# Altium PCB pbcBoard.PcbDoc
Units mm, origin at the board's own origin, x right, y up, seen from the top; angles counter-clockwise.
Board outline 100 x 50 mm, 2 copper layers (Top Layer, Bottom Layer); 38 components, 24 nets, 181 pads, 64 vias.
Unrouted connection lines stored in the file: 1.
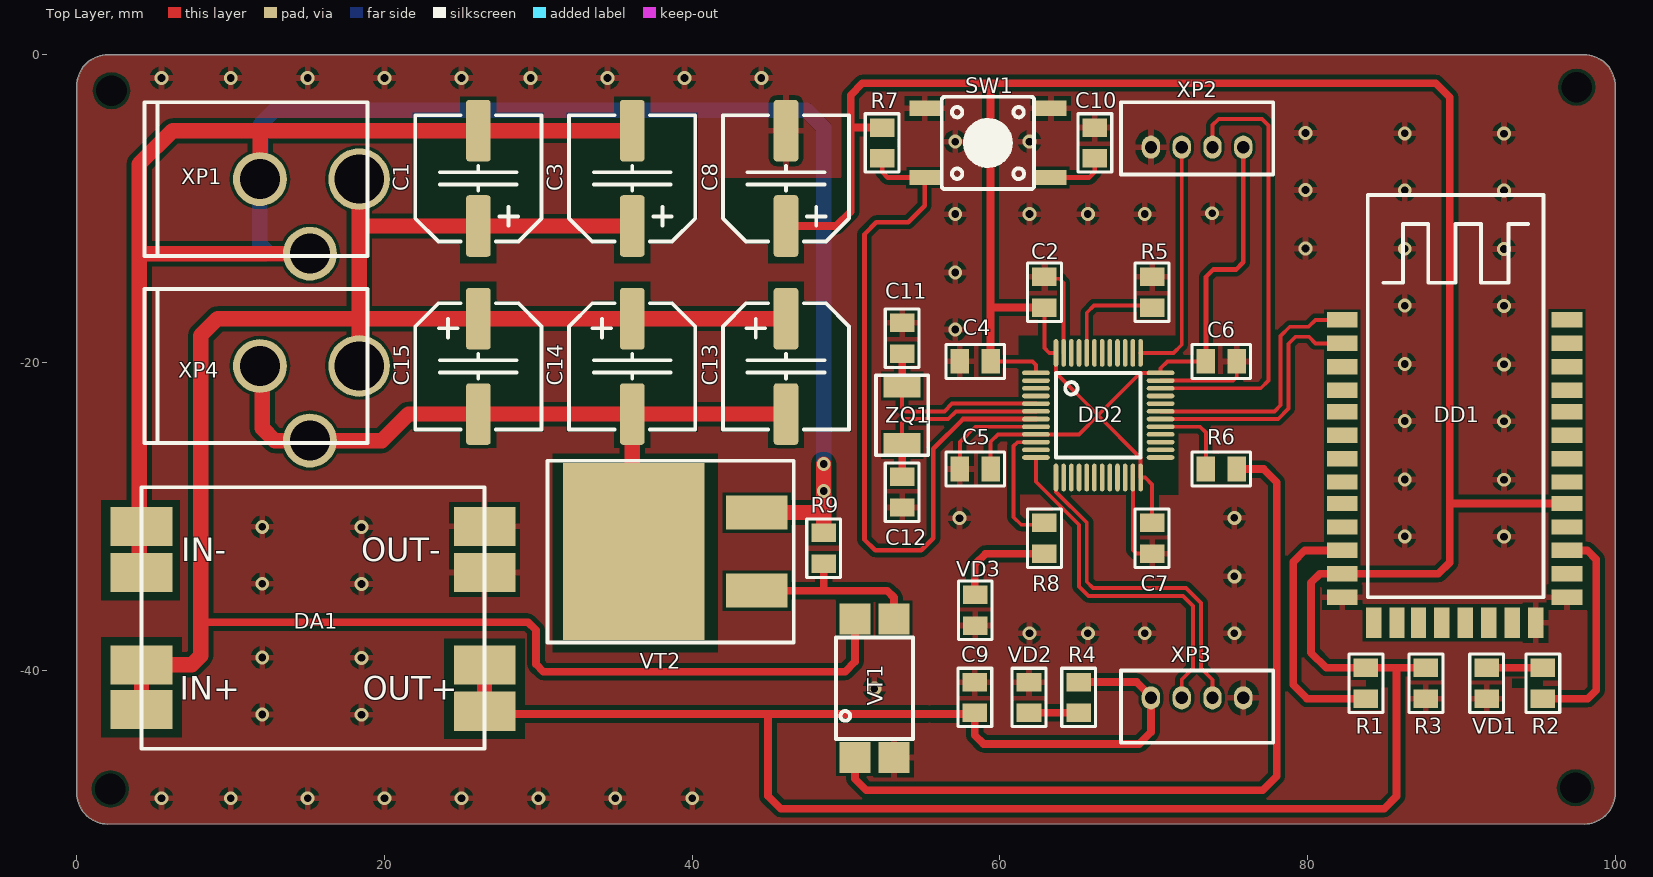
[diagram p0: Top Layer view]
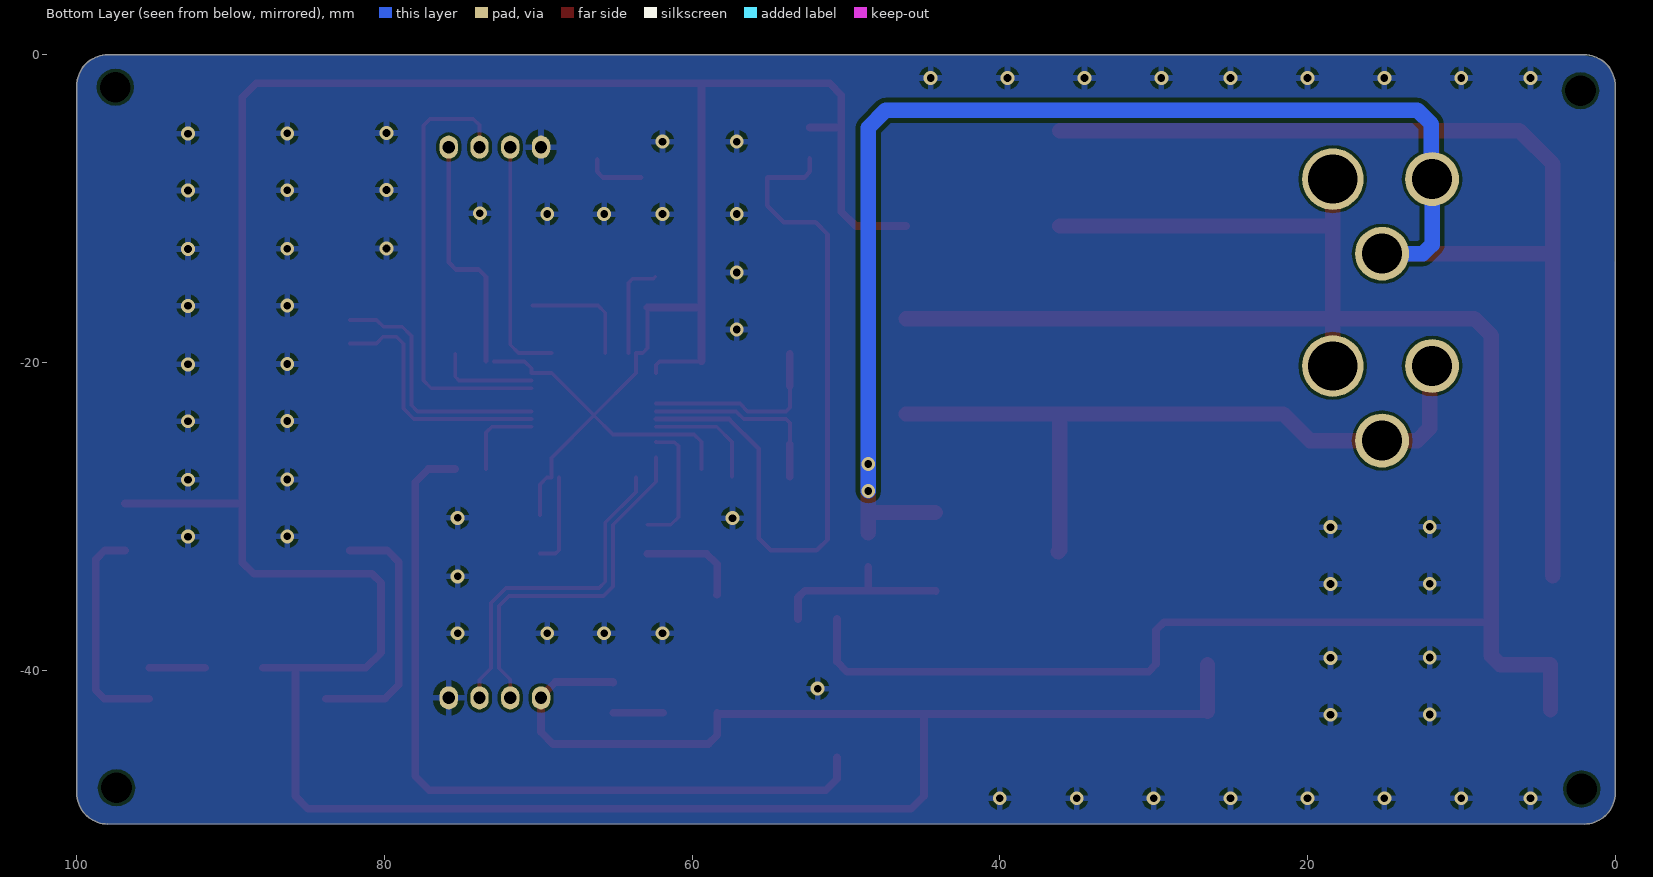
[diagram p1: Bottom Layer view, seen from below]
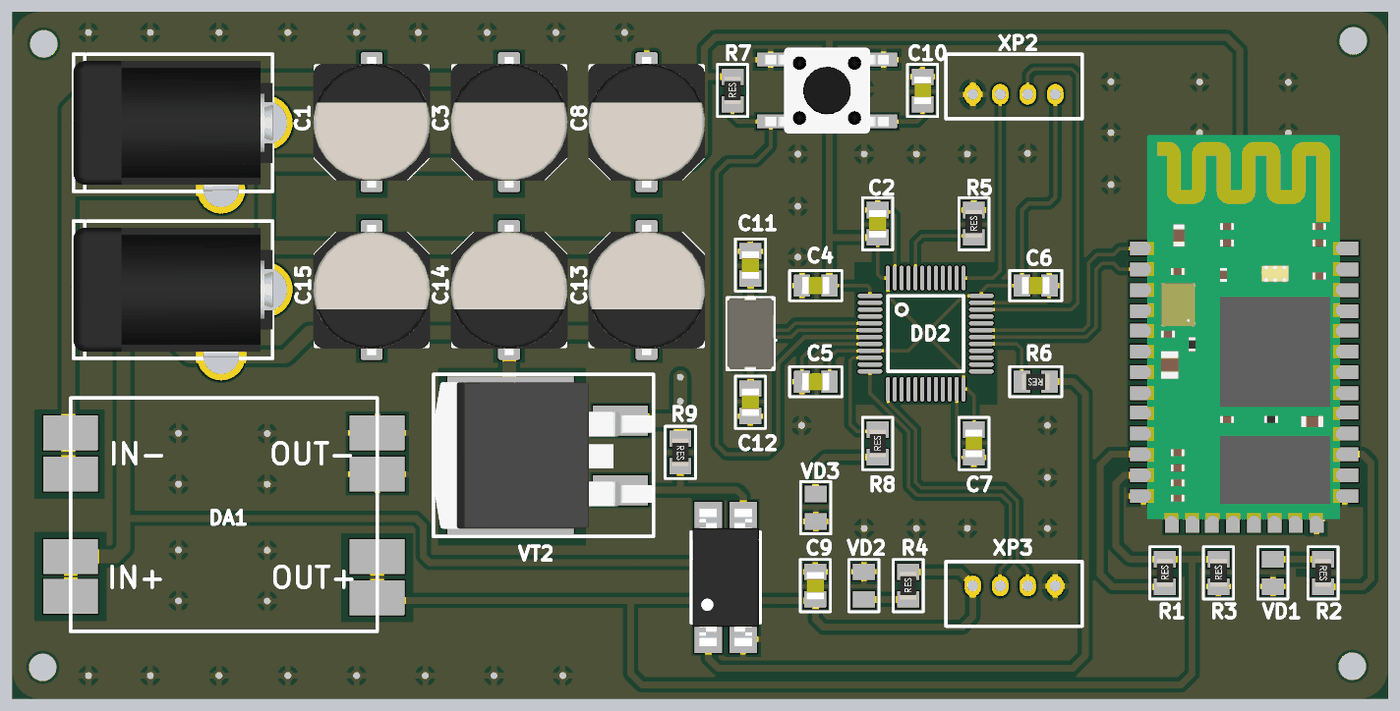
[diagram p2: 3D render of the assembled board from above, using the file's embedded part models]

## Layer stack, top to bottom
Top Solder: solder mask 0.0102, Solder Resist, Dk 3.5
Top Layer: signal copper 0.0356
Dielectric 1: dielectric 0.32, FR-4, Dk 4.8
Bottom Layer: signal copper 0.0356
Bottom Solder: solder mask 0.0102, Solder Resist, Dk 3.5

## Board outline
0,-48 0,-2 cw(c2,-2) 2,0 98,0 cw(c98,-2) 100,-2 100,-48 cw(c98,-48) 98,-50 2,-50 cw(c2,-48)

## Design rules (kind name [scope] priority, off if disabled: settings)
Clearance [All] p1: gap=0.2 ignorepadtopadclearanceinfootprint=FALSE except(0.3: Arc-Fill Arc-Poly Arc-Region Track-Fill Track-Poly Track-Region)
DiffPairsRouting [All] p1: maxlimit=0.254 minlimit=0.1 mostfreqgap=0.254 toplayer_minwidth=0.1 toplayer_maxwidth=0.381 toplayer_prefwidth=0.381 bottomlayer_minwidth=0.1 bottomlayer_maxwidth=0.381 bottomlayer_prefwidth=0.381 maxuncoupledlength=12.7
PolygonConnect [All] p1: thpad.connectstyle=Relief thpad.reliefconductorwidth=0.4 thpad.reliefentries=4 thpad.polygonreliefangle="90 Angle" thpad.airgapwidth=0.4 smdpad.connectstyle=Relief smdpad.reliefconductorwidth=0.4 smdpad.reliefentries=4 smdpad.polygonreliefangle="90 Angle" smdpad.airgapwidth=0.3 via.connectstyle=Relief via.reliefconductorwidth=0.4 via.reliefentries=4 via.polygonreliefangle="90 Angle" via.airgapwidth=0.3
RoutingVias [All] p1: holewidth=0.711 width=1.27 viastyle="Through Hole" minholewidth=0.711 minwidth=1.27 maxholewidth=0.711 maxwidth=1.27
SolderMaskExpansion [All] p1: expansion=0.102
Width [All] p1: maxlimit=2 minlimit=0.2 preferedwidth=0.254
29 further rules are at their usual default settings.

## Classes and differential pairs
component class Schematic: C1 C2 C4 C5 C6 C7 C8 C9 C10 C11 C12 C14 DA1 DD1 DD2 R1 R2 R3 R4 R5 R6 R7 R8 R9 SW1 VD1 VD2 VD3 VT1 VT2 XP2 XP3 XP4 XS1 XS2 ZQ1

## Components (designator, comment, footprint, x,y, rotation, side; value= is the part's Value field where it differs from the comment)
C1 "220uF_25V_chip" chip_25V_220uF 26.1,-8.025 r0 top value="220 ???"
C2 "SMD0805" "CAP: SMD0805" 62.9,-15.425 r270 top value=0,1???
C3 "220uF_25V_chip" chip_25V_220uF 36.1,-8.025 r0 top value="220 ???"
C4 "SMD0805" "CAP: SMD0805" 58.4,-19.925 r0 top value=0,1???
C5 "SMD0805" "CAP: SMD0805" 58.4,-26.925 r0 top value=0,1???
C6 "SMD0805" "CAP: SMD0805" 74.4,-19.925 r180 top value=0,1???
C7 "SMD0805" "CAP: SMD0805" 69.9,-31.425 r90 top value=0,1???
C8 "220uF_25V_chip" chip_25V_220uF 46.1,-8.025 r0 top value="220 ???"
C9 "SMD0805" "CAP: SMD0805" 58.375,-41.775 r270 top value=0,1???
C10 "SMD0805" "CAP: SMD0805" 66.175,-5.725 r270 top value=0,1???
C11 "SMD0805" "CAP: SMD0805" 53.65,-18.425 r90 top value=22???
C12 "SMD0805" "CAP: SMD0805" 53.65,-28.425 r270 top value=22???
C13 "220uF_25V_chip" chip_25V_220uF 46.1,-20.25 r180 top value="220 ???"
C14 "220uF_25V_chip" chip_25V_220uF 36.1,-20.25 r180 top value="220 ???"
C15 "220uF_25V_chip" chip_25V_220uF 26.1,-20.25 r180 top value="220 ???"
DA1 "MP2363DN" MP2363DN 4.2,-28.11 r0 top
DD1 "HC-06" HC-06 89.25,-21.8 r0 top
DD2 "STM32F103C8T6" LQFP48_N 66.4,-23.425 r0 top
R1 "4,7кОм" "RES: SMD0805" 83.8,-40.85 r90 top
R2 "470Ом" "RES: SMD0805" 95.3,-40.85 r270 top
R3 "4,7кОм" "RES: SMD0805" 87.7,-40.85 r90 top
R4 "470Ом" "RES: SMD0805" 65.125,-41.775 r90 top
R5 "4,7кОм" "RES: SMD0805" 69.9,-15.425 r90 top
R6 "1кОм" "RES: SMD0805" 74.4,-26.925 r180 top
R7 "4,7кОм" "RES: SMD0805" 52.35,-5.725 r90 top
R8 "470Ом" "RES: SMD0805" 62.9,-31.425 r90 top
R9 "10кОм" "RES: SMD0805" 48.55,-32.075 r270 top
SW1 "SWITCH" KLS76X6X4.3 59.225,-5.725 r180 top
VD1 "RED" LED0805 91.65,-40.85 r270 top
VD2 "RED" LED0805 61.9,-41.775 r90 top
VD3 "RED" LED0805 58.4,-36.1 r270 top
VT1 "PC817" DIP4_SMD_PC817 51.85,-41.175 r0 top
VT2 "IRF540" IRF540_D2PAK 36.2,-32.29 r90 top
XP1 "PORT" DJK-02A 11.65,-8.075 r270 top
XP2 "PORT" PH2.0-4P 72.825,-6 r180 top
XP3 "PORT" PH2.0-4P 72.825,-41.8 r0 top
XP4 "PORT" DJK-02A 11.65,-20.225 r270 top
ZQ1 "8MHz" HC-49SM 53.65,-23.425 r270 top

## Footprints (in the part's own frame and the unit in brackets; to place one, negate y for a bottom-side part, rotate by r counter-clockwise, add the part's x,y. Pads: shape width x height; smd on the part's side, far side on the other; paste and mask are expansions set on the pad)
"CAP: SMD0805" [mm]
  rect 1.2x1.6 smd: 1(-1,0) 2(1,0)
  silkscreen extent -1.9,-1.1 1.9,1.1, body extent -1,-0.62 1,0.63, height 1.01
chip_25V_220uF [mm] "Capacitor, polarized, aluminum can; 8.0x6.2mm DxH"
  round 0.635 on Mech15: 0(0,0)
  rrect25% 1.6x4 smd: 1(0,-3.1) 2(0,3.1)
  silkscreen extent -4.1,-4.1 4.1,4.1, body extent -4.25,-4.75 4.25,4.75, height 6.5
DIP4_SMD_PC817 [mm]
  rect 2x2 smd: 1(-1.27,-4.5) 2(1.27,-4.5) 3(1.27,4.5) 4(-1.27,4.5)
  silkscreen extent -2.5,-3.3 2.5,3.3, body extent -2.42,-5.01 2.42,5.02, height 3.9
DJK-02A [mm]
  round 4 hole 3.2: 1(0,6.7)
  round 3.5 hole 2.6: 2(0,0.25) 2(4.85,3.5)
  silkscreen extent -5,-7.25 5,7.25, body extent -4.5,-7.25 4.95,7.25, height 11.5
HC-06 [mm]
  rect 2x1 smd: 1(-6.985,4.572) 2(-6.985,3.048) 3(-6.985,1.524) 4(-6.985,0) 5(-6.985,-1.397) 6(-6.985,-2.921) 7(-6.985,-4.445) 8(-6.985,-5.969) 9(-6.985,-7.366) 10(-6.985,-8.89) 11(-6.985,-10.414) 12(-6.985,-11.938) 13(-6.985,-13.462) 22(7.62,-13.462) 23(7.62,-11.938) 24(7.62,-10.414) 25(7.62,-8.89) 26(7.62,-7.366) 27(7.62,-5.969) 28(7.62,-4.445) 29(7.62,-2.921) 30(7.62,-1.397) 31(7.62,0) 32(7.62,1.524) 33(7.62,3.048) 34(7.62,4.572)
  rect 1x2 smd: 14(-4.953,-15.113) 15(-3.429,-15.113) 16(-2.032,-15.113) 17(-0.508,-15.113) 18(1.016,-15.113) 19(2.54,-15.113) 20(4.064,-15.113) 21(5.588,-15.113)
  silkscreen extent -5.33,-13.46 6.1,12.7, body extent -6.74,-15.19 7.28,12.82, height 2.35
HC-49SM [mm]
  rect 1.5x2.4 smd: 1(-1.9,0) 2(1.9,0)
  silkscreen extent -2.6,-1.7 2.6,1.7, body extent -2.6,-1.7 2.6,1.7, height 1.3
IRF540_D2PAK [mm]
  rect 2.2x4 smd: 1(-2.54,-8) 3(2.54,-8)
  rect 11.5x9.2 smd: 2(0,0)
  silkscreen extent -5.9,-10.4 5.9,5.6, body extent -5.33,-10.29 5.34,5.59, height 4.83
KLS76X6X4.3 [mm]
  rect 2x1 smd: 1(-4.1,2.25) 1(4.1,2.25) 2(-4.1,-2.25) 2(4.1,-2.25)
  silkscreen extent -3,-3 3,3, body extent -4.5,-3 4.5,3, height 4.3
LED0805 [mm]
  rect 1.2x1.6 smd: 1(-1,0) 2(1,0)
  silkscreen extent -1.9,-1.1 1.9,1.1, body extent -1.05,-0.67 1.05,0.68, height 0.9
LQFP48_N [mm] "QFP, 48-Leads, Body 7x7mm, Pitch 0.5mm, IPC Medium Density"
  oval 1.8x0.3 smd: 1(-4.05,2.75) 2(-4.05,2.25) 3(-4.05,1.75) 4(-4.05,1.25) 5(-4.05,0.75) 6(-4.05,0.25) 7(-4.05,-0.25) 8(-4.05,-0.75) 9(-4.05,-1.25) 10(-4.05,-1.75) 11(-4.05,-2.25) 12(-4.05,-2.75) 25(4.05,-2.75) 26(4.05,-2.25) 27(4.05,-1.75) 28(4.05,-1.25) 29(4.05,-0.75) 30(4.05,-0.25) 31(4.05,0.25) 32(4.05,0.75) 33(4.05,1.25) 34(4.05,1.75) 35(4.05,2.25) 36(4.05,2.75)
  oval 0.3x1.8 smd: 13(-2.75,-4.05) 14(-2.25,-4.05) 15(-1.75,-4.05) 16(-1.25,-4.05) 17(-0.75,-4.05) 18(-0.25,-4.05) 19(0.25,-4.05) 20(0.75,-4.05) 21(1.25,-4.05) 22(1.75,-4.05) 23(2.25,-4.05) 24(2.75,-4.05) 37(2.75,4.05) 38(2.25,4.05) 39(1.75,4.05) 40(1.25,4.05) 41(0.75,4.05) 42(0.25,4.05) 43(-0.25,4.05) 44(-0.75,4.05) 45(-1.25,4.05) 46(-1.75,4.05) 47(-2.25,4.05) 48(-2.75,4.05)
  silkscreen extent -2.75,-2.75 2.75,2.75, body extent -4.49,-4.49 4.49,4.49, height 1.6
MP2363DN [mm]
  rect 4x2.54 smd: 1(0,-5.54) 1(0,-2.54) 2(0,-14.46) 2(0,-11.54) 3(22.3,-14.56) 3(22.3,-11.54) 4(22.3,-5.54) 4(22.3,-2.54)
  silkscreen extent 0,-17 22.3,0, body extent 0,-17 22.3,0, height 4.2
PH2.0-4P [mm]
  oval 1.2x1.5 hole 0.8: 1(-3,0) 2(-1,0) 3(1,0) 4(3,0)
  silkscreen extent -4.95,-2.92 4.95,1.78, body extent -4.95,-2.85 4.95,1.65, height 6
"RES: SMD0805" [mm]
  rect 1.2x1.6 smd: 1(-1,0) 2(1,0)
  silkscreen extent -1.9,-1.1 1.9,1.1, body extent -1,-0.6 1,0.6, height 0.7

## Part data
C2 C4 C5 C6 C7 C9 C10 C11 C12: "CAP"
DA1: "??????????????? ??????????"
DD2: library part STM32F103C8T6(Dinara), I/Os (High Current)=37, Operating Frequency(F) (Processor speed) (MHz)=72, Supplier Part Number 1=497-6063-ND, Supply Voltage(Vcc) min (V)=2, A/D Converter="2x12-bit (10 Channel)", ComponentLink1Description="Manufacturer URL", ComponentLink1URL=http://www.st.com/web/en/home.html, ComponentLink2Description=Datasheet, ComponentLink2URL=http://www.st.com/st-web-ui/static/active/en/resource/technical/document/datasheet/CD00161566.pdf, ComponentLink3Description="Package Specification", ComponentLink3URL=http://www.st.com/st-web-ui/static/active/en/resource/technical/document/datasheet/DM00058181.pdf, Core="ARM Cortex-M3", DatasheetVersion="Rev. 16", FLASH Size (Prog) (kB)=64, Internal RAM Size (kB)=20, Mounting Technology="Surface Mount", PackageDescription="48-Pin Low Profile Quad Flat Package, 7 x 7 mm Body, 0.5 mm Pitch", PackageReference=LQFP48, PackageVersion="Rev. 6, 06/2013", Packing=Tray, PartNumber=STM32F103C8T6, Supplier 1=Digi-Key, Supplier 2=Farnell, Supplier 3=Newark, Supplier 4=Newark, Supplier 5=Mouser, Supplier Part Number 2=1447637, Supplier Part Number 3=59M2182, Supplier Part Number 4=57P1222, Supplier Part Number 5=511-STM32F103C8T6
R1 R2 R3 R4 R5 R6 R7 R8 R9: library part SMD0805
VD1 VD2 VD3: library part diode_led
XP1: library part PH2.0-2P_XS1
XP2: library part PH2.0-4P_XP1
XP3: library part PH2.0-4P_XP2
XP4: library part PH2.0-2P_XS2
ZQ1: library part HC-49
DD1: ComponentLink1Description=Datasheet, ComponentLink1URL=http://www.farnell.com/datasheets/2236920.pdf
SW1: ComponentLink1Description=AliExpress, ComponentLink1URL=https://ru.aliexpress.com/item/10PCS-4-4-1-6mm-4x4x1-6H-SMD-push-button-switch-microswitch-Tact-Switch/32731081870.html?spm=a2g0s.9042311.0.0.250233edGDnBBV
VT2: Published=10.02.2014, Publisher="Andrew Danich", Type=??????????

## Free pads (board coordinates)
  round 1.524 hole 2: 2(2.175,-47.725) 2(2.25,-2.325) 2(97.425,-47.65) 2(97.5,-2.1)

## Via types
v1: diameter 0.9, hole 0.5, Top Layer to Bottom Layer, tented both sides, 64 vias

## Nets (pads, with @x,y where several pads share a name; then routed paths per layer and width w, separated by ;. In a path a pad name is that pad's centre, name@x,y a point inside that pad or via, vN(x,y) a via of type N, cw(c..) or ccw(c..) an arc to the next point about the centre after c; other vN are vias at no path point)
+3.3V: C2.2 C4.2 C5.2 C6.2 C7.2 C8.1 C9.2 DA1.3 DD1.12 DD1.26 DD2.1 DD2.9 DD2.24 DD2.36 DD2.48 R1.2 R3.2 R4.2 R7.2 XP2.1 XP3.1 | length 300.3
  Top Layer w0.25: C5.2 59.4,-25.15 59.875,-24.675 DD2.9 65.15,-24.675 66.4,-23.425 ; C4.2 62.125,-19.925 62.35,-20.15 DD2.1 ; C2.2 62.9,-19.061 63.214,-19.375 DD2.48 63.65,-20.675 66.4,-23.425 ; 69.15,-20.7 69.125,-20.675 ; C7.2@69.9,-29.925 69.9,-27.925 69.45,-27.475 DD2.24 69.15,-26.2 66.4,-23.45 66.4,-23.425 ; C6.2@72.9,-19.925 70.9,-19.925 70.45,-20.375 DD2.36 69.125,-20.675 ; 66.4,-23.425 66.4,-23.4 69.125,-20.675
  Top Layer w0.3: C6.2 73.4,-14.437 73.887,-13.95 75.367,-13.95 75.825,-13.491 XP2.1
  Top Layer w0.5: DA1.3@26.325,-42.845 44.925,-42.845 ; C8.1 49.364,-11.125 50.3,-10.189 50.3,-4.7 ; R7.2 50.325,-4.725 50.3,-4.7 ; 55.35,-42.845 44.925,-42.845 ; 55.5,-42.845 58.305,-42.845 C9.2 58.375,-44.232 58.943,-44.8 69.057,-44.8 69.825,-44.032 69.825,-41.7 68.9,-40.775 R4.2 ; C4.2 59.4,-16.425 ; C2.2 59.4,-16.425 ; R1.2 81.22,-39.85 80.225,-38.855 80.225,-34.325 80.812,-33.738 DD1.12 88.512,-33.738 89.25,-33 89.25,-2.763 88.337,-1.85 59.4,-1.85 ; R1.2 85.79,-39.85 ; R3.2@87.925,-39.85 85.79,-39.85 ; 89.316,-29.166 DD1.26 ; 44.925,-42.845 44.925,-48.175 45.75,-49 84.982,-49 85.79,-48.191 85.79,-39.85 ; 50.3,-4.7 50.3,-2.618 51.068,-1.85 59.4,-1.85 ; 59.4,-16.425 59.4,-1.85
  Top Layer w1: DA1.3@26.5,-42.67 DA1.3@26.5,-39.65
+18V: C1.1 C3.1 C13.1 C14.1 C15.1 DA1.2 VT1.4 XP1.1 XP4.1 | length 144.5
  Top Layer w0.5: 8.05,-36.875 29.325,-36.875 29.85,-37.4 29.85,-39.625 30.325,-40.1 49.939,-40.1 50.58,-39.459 VT1.4
  Top Layer w1: DA1.2@4.2,-42.57 4.2,-39.65 7.464,-39.65 8.05,-39.064 8.05,-36.875 8.05,-18.25 9.15,-17.15 18.35,-17.15 ; XP4.1 18.35,-17.15 ; XP1.1 18.35,-11.075 ; C3.1 C1.1 18.4,-11.125 18.35,-11.075 ; C13.1 C14.1 C15.1 18.35,-17.15 ; 18.35,-17.15 18.35,-11.075
AGND: C1.2 C3.2 DA1.1 R9.1 VT2.3 XP1.2 | length 154.8
  Top Layer w1: DA1.1@4.05,-33.85 4.05,-30.65 4.05,-12.85 ; XP1.2@11.9,-8.075 11.925,-8.05 11.925,-4.925 ; XP1.2@15.15,-12.925 4.125,-12.925 4.05,-12.85 ; C3.2 C1.2 11.925,-4.925 ; VT2.3 48.172,-29.75 ; R9.1 v1(48.55,-28.35) v1(48.55,-26.6) ; 4.05,-12.85 4.05,-7.107 6.232,-4.925 11.925,-4.925
  Bottom Layer w1: XP1.2@15.15,-12.925 12.486,-12.925 11.9,-12.339 11.9,-8.075 11.95,-8.025 11.95,-4.507 12.858,-3.6 47.425,-3.6 48.55,-4.725 v1(48.55,-26.6) v1(48.55,-28.35)
GND: C2.1 C4.1 C5.1 C6.1 C7.1 C8.2 C9.1 C10.1 C11.2 C12.2 DA1.4 DD1.13 DD1.21 DD1.22 DD2.8 DD2.23 DD2.35 DD2.47 R3.1 R5.2 SW1.2 VD1.2 VD2.2 VD3.2 VT1.2 XP2.4 XP3.4 | length 26.7
  Top Layer w0.25: C5.1@57.4,-27.425 C5.1 57.4,-25.175 58.4,-24.175 DD2.8 ; C2.1@62.4,-14.425 62.525,-14.55 63.875,-14.55 64.15,-14.825 DD2.47 ; DD2.23 68.65,-32.2 68.875,-32.425 C7.1 ; DD2.35 75.15,-21.175 75.4,-20.925 C6.1 C6.1@75.4,-19.425
  other v1: 5.5,-48.33 10,-48.33 15,-48.33 20,-48.33 25,-48.33 30,-48.33 35,-48.33 40,-48.33 12.05,-42.882 18.5,-42.9 51.845,-41.2 18.5,-39.2 12.05,-39.182 61.925,-37.6 65.725,-37.6 69.425,-37.6 75.25,-37.6 18.5,-34.4 12.05,-34.382 75.25,-33.9 86.325,-31.3 92.775,-31.318 18.5,-30.7 12.05,-30.682 57.375,-30.116 75.25,-30.1 92.775,-27.618 86.325,-27.6 92.775,-23.818 86.325,-23.8 86.325,-20.1 92.775,-20.118 57.1,-17.85 92.775,-16.318 86.325,-16.3 57.1,-14.15 92.775,-12.618 79.875,-12.582 86.325,-12.6 57.1,-10.35 61.925,-10.35 65.725,-10.35 69.425,-10.35 73.8,-10.3 86.325,-8.8 92.775,-8.818 79.875,-8.782 57.1,-5.637 61.925,-5.637 92.775,-5.118 86.325,-5.1 79.875,-5.082 5.5,-1.5 10,-1.5 15,-1.5 20,-1.5 25,-1.5 25,-1.5 29.5,-1.5 34.5,-1.5 39.5,-1.5 44.5,-1.5
NetC10_2: C10.2 DD2.7 R7.1 SW1.1 | length 52.4
  Top Layer w0.3: R7.1 52.35,-7.6 52.725,-7.975 55.125,-7.975 55.125,-9.795 54.041,-10.878 51.97,-10.878 51.2,-11.648 51.2,-31.52 51.894,-32.214 54.886,-32.214 55.675,-31.425 55.675,-25.604 57.604,-23.675 DD2.7 ; SW1.1@63.325,-7.975 65.8,-7.975 66.175,-7.6 C10.2@66.175,-6.8
NetC11_1: C11.1 DD2.5 ZQ1.1 | length 12.5
  Top Layer w0.254: ZQ1.1 53.65,-22.925 53.9,-23.175 56.4,-23.175 56.9,-22.675 DD2.5
  Top Layer w0.5: ZQ1.1 C11.1
NetC12_1: C12.1 DD2.6 ZQ1.2 | length 12.5
  Top Layer w0.254: ZQ1.2 53.65,-23.925 53.9,-23.675 56.65,-23.675 57.15,-23.175 DD2.6
  Top Layer w0.5: C12.1 ZQ1.2
NetC13_2: C13.2 C14.2 C15.2 VT2.2 XP4.2 | length 48.2
  Top Layer w1: XP4.2@11.9,-20.225 12.05,-20.375 12.05,-24.265 12.86,-25.075 15.15,-25.075 19.836,-25.075 21.561,-23.35 C15.2 C14.2 ; VT2.2 36.1,-32.19 C14.2 ; C13.2 C14.2
NetDD1_1: DD1.1 DD2.31 | length 16.9
  Top Layer w0.25: DD2.31 77.85,-23.175 78.25,-22.775 78.25,-18.275 78.851,-17.674 80.076,-17.674 80.522,-17.228 DD1.1
NetDD1_2: DD1.2 DD2.30 | length 16.7
  Top Layer w0.25: DD2.30 78.1,-23.675 78.775,-23 78.775,-18.775 79.225,-18.325 80.095,-18.325 80.522,-18.752 DD1.2
NetDD1_11: DD1.11 R1.1 | length 16.6
  Top Layer w0.5: DD1.11 79.836,-32.214 79.081,-32.968 79.081,-40.956 79.975,-41.85 R1.1
NetDD1_24: DD1.24 R2.2 | length 14.3
  Top Layer w0.5: R2.2 98.225,-41.85 98.775,-41.3 98.775,-32.806 98.183,-32.214 DD1.24
NetDD2_12: DD2.12 XP3.2 | length 24.1
  Top Layer w0.25: DD2.12 62.35,-27.75 65.15,-30.55 65.15,-34.55 65.775,-35.175 71.9,-35.175 72.55,-35.825 72.55,-39.875 71.825,-40.6 XP3.2 ; XP3.2@71.575,-41.8 XP3.2@71.8,-41.575
NetDD2_13: DD2.13 XP3.3 | length 22.1
  Top Layer w0.25: DD2.13 63.66,-27.484 63.66,-28.406 65.65,-30.396 65.65,-34.25 66.05,-34.65 72.1,-34.65 73.075,-35.625 73.075,-39.875 73.825,-40.625 73.825,-41.575 XP3.3
NetDD2_29: DD2.29 R6.2 | length 5.5
  Top Layer w0.25: DD2.29 73.025,-24.175 73.4,-24.55 R6.2
NetDD2_34: DD2.34 XP2.2 | length 29.2
  Top Layer w0.25: DD2.34 76.966,-21.675 77.475,-21.166 77.475,-4.6 77.039,-4.164 74.228,-4.164 73.825,-4.567 XP2.2
NetDD2_37: DD2.37 XP2.3 | length 15.7
  Top Layer w0.25: DD2.37 71.292,-19.375 71.825,-18.842 XP2.3
NetDD2_44: DD2.44 R5.1 | length 7.6
  Top Layer w0.25: DD2.44 65.65,-16.763 66.114,-16.3 R5.1@70.4,-16.3
NetR2_1: R2.1 VD1.1 | length 3.7
  Top Layer w0.5: VD1.1 R2.1
NetR4_1: R4.1 VD2.1 | length 3.2
  Top Layer w0.5: VD2.1 R4.1
NetR6_1: R6.1 VT1.1 | length 51.6
  Top Layer w0.5: VT1.1 50.58,-47.055 51.325,-47.8 77.1,-47.8 78,-46.9 78,-27.775 77.15,-26.925 R6.1
NetR8_1: R8.1 VD3.1 | length 6.8
  Top Layer w0.5: VD3.1 58.375,-35.075 58.375,-33.125 59.075,-32.425 R8.1
NetR9_2: R9.2 VT1.3 VT2.1 | length 12.1
  Top Layer w0.5: VT2.1@44.175,-34.855 VT2.1 48.55,-34.83 ; R9.2@48.55,-33.29 48.55,-34.83 ; VT1.3 53.12,-35.275 52.675,-34.83 48.55,-34.83
PA0: DD2.10 R8.2 | length 8.4
  Top Layer w0.25: DD2.10 62.34,-25.184 61.14,-25.184 60.9,-25.425 60.9,-30.056 61.394,-30.55 R8.2@62.9,-30.55
pads on no net: C1.0 C3.0 C8.0 C13.0 C14.0 C15.0 DD1.3 DD1.4 DD1.5 DD1.6 DD1.7 DD1.8 DD1.9 DD1.10 DD1.14 DD1.15 DD1.16 DD1.17 DD1.18 DD1.19 DD1.20 DD1.23 DD1.25 DD1.27 DD1.28 DD1.29 DD1.30 DD1.31 DD1.32 DD1.33 DD1.34 DD2.2 DD2.3 DD2.4 DD2.11 DD2.14 DD2.15 DD2.16 DD2.17 DD2.18 DD2.19 DD2.20 DD2.21 DD2.22 DD2.25 DD2.26 DD2.27 DD2.28 DD2.32 DD2.33 DD2.38 DD2.39 DD2.40 DD2.41 DD2.42 DD2.43 DD2.45 DD2.46

## Polygon pours and split planes (outlines as drawn)
GND on Top Layer "Top Layer-GND" (solid, pour order 0): 2,0 98,0 cw(c98,-2) 100,-2 100,-47.9 cw(c97.9,-47.9) 97.9,-50 2,-50 cw(c2,-48) 0,-48 0,-2 cw(c2,-2)
GND on Bottom Layer "Top Layer-GND" (solid, pour order 12): 0,0 98,0 cw(c98,-2) 100,-2 100,-48 cw(c98,-48) 98,-50 2.099,-50 cw(c2.099,-47.903) 0.002,-47.901 0.047,-1.953 cw(c1.925,-1.953)

## Other copper
Top Layer:
  pour cut-out: 61.2,-18.228 71.6,-18.228 71.6,-28.6 61.196,-28.6
  pour cut-out: 48.635,-12.281 47.262,-12.281 47.262,-13.541 44.938,-13.541 44.938,-12.331 44.937,-12.262 43.566,-12.292 41.85,-10.56 41.85,-8.022 50.35,-8.028 50.35,-10.584
  pour cut-out: 43.565,-15.994 44.938,-15.994 44.938,-14.734 47.262,-14.734 47.262,-15.943 47.262,-16.013 48.634,-15.982 50.35,-17.714 50.35,-24.499 47.262,-24.499 47.262,-25.55 44.937,-25.55 44.937,-24.498 41.85,-24.497 41.85,-17.69
  pour cut-out: 33.565,-15.994 34.938,-15.994 34.938,-14.734 37.262,-14.734 37.262,-15.943 37.262,-16.013 38.634,-15.982 40.35,-17.714 40.35,-24.499 37.262,-24.499 37.262,-25.55 34.937,-25.55 34.937,-24.498 31.85,-24.497 31.85,-17.69
  pour cut-out: 23.565,-15.994 24.938,-15.994 24.938,-14.734 27.262,-14.734 27.262,-15.943 27.262,-16.013 28.634,-15.982 30.35,-17.714 30.35,-24.499 27.262,-24.499 27.262,-25.55 24.937,-25.55 24.937,-24.498 21.85,-24.497 21.85,-17.69
  pour cut-out: 38.635,-12.281 37.262,-12.281 37.262,-13.541 34.938,-13.541 34.938,-12.331 34.937,-12.262 33.566,-12.292 31.85,-10.56 31.85,-3.775 34.938,-3.775 34.938,-2.725 37.263,-2.725 37.263,-3.776 40.35,-3.777 40.35,-10.584
  pour cut-out: 23.875,-37.95 29.125,-37.95 29.125,-44.45 23.875,-44.45
  pour cut-out: 1.57,-28.964 6.7,-28.964 6.7,-35.464 1.57,-35.464
  pour cut-out: 1.575,-37.85 6.825,-37.85 6.825,-44.35 1.575,-44.35
  pour cut-out: 30.925,-25.925 41.675,-25.925 41.675,-38.85 30.925,-38.85
  pour cut-out: 53.328,-6.05 53.328,-5.45 51.329,-5.45 51.329,-6.05
  pour cut-out: 95.3,-41.141 95.3,-40.541 93.3,-40.541 93.3,-41.141
  pour cut-out: 85.8,-41.149 85.8,-40.549 83.8,-40.549 83.8,-41.149
  pour cut-out: 66.125,-42.1 66.125,-41.5 64.125,-41.5 64.125,-42.1
  pour cut-out: 74.125,-27.925 74.725,-27.925 74.725,-25.925 74.125,-25.925
  pour cut-out: 71.712,-21.925 76.927,-21.925 77.827,-21.132 77.823,-21.925 77.827,-22.825 72.375,-22.825 71.713,-22.825
  pour cut-out: 28.635,-12.281 27.262,-12.281 27.262,-13.541 24.938,-13.541 24.938,-12.331 24.937,-12.262 23.566,-12.292 21.85,-10.56 21.85,-3.775 24.938,-3.775 24.938,-2.725 27.263,-2.725 27.263,-3.776 30.35,-3.777 30.35,-10.584
  pour cut-out: 61.9,-31.125 61.9,-31.725 63.9,-31.725 63.9,-31.125

## Silkscreen, mask and mechanical layers (free items; w line width, h text height)
Mechanical 1:
  the board outline again, w0.5

## Text inside footprints (layer, text, board x,y; h text height)
DA1: Top Overlay "OUT+" at 18.6,-41.91 h1.52; Top Overlay "OUT-" at 18.5,-32.91 h1.52; Top Overlay "IN+" at 6.7,-41.91 h1.52; Top Overlay "IN-" at 6.8,-32.91 h1.52